# Allegro board FIBER-E1-PWR_01v1.brd
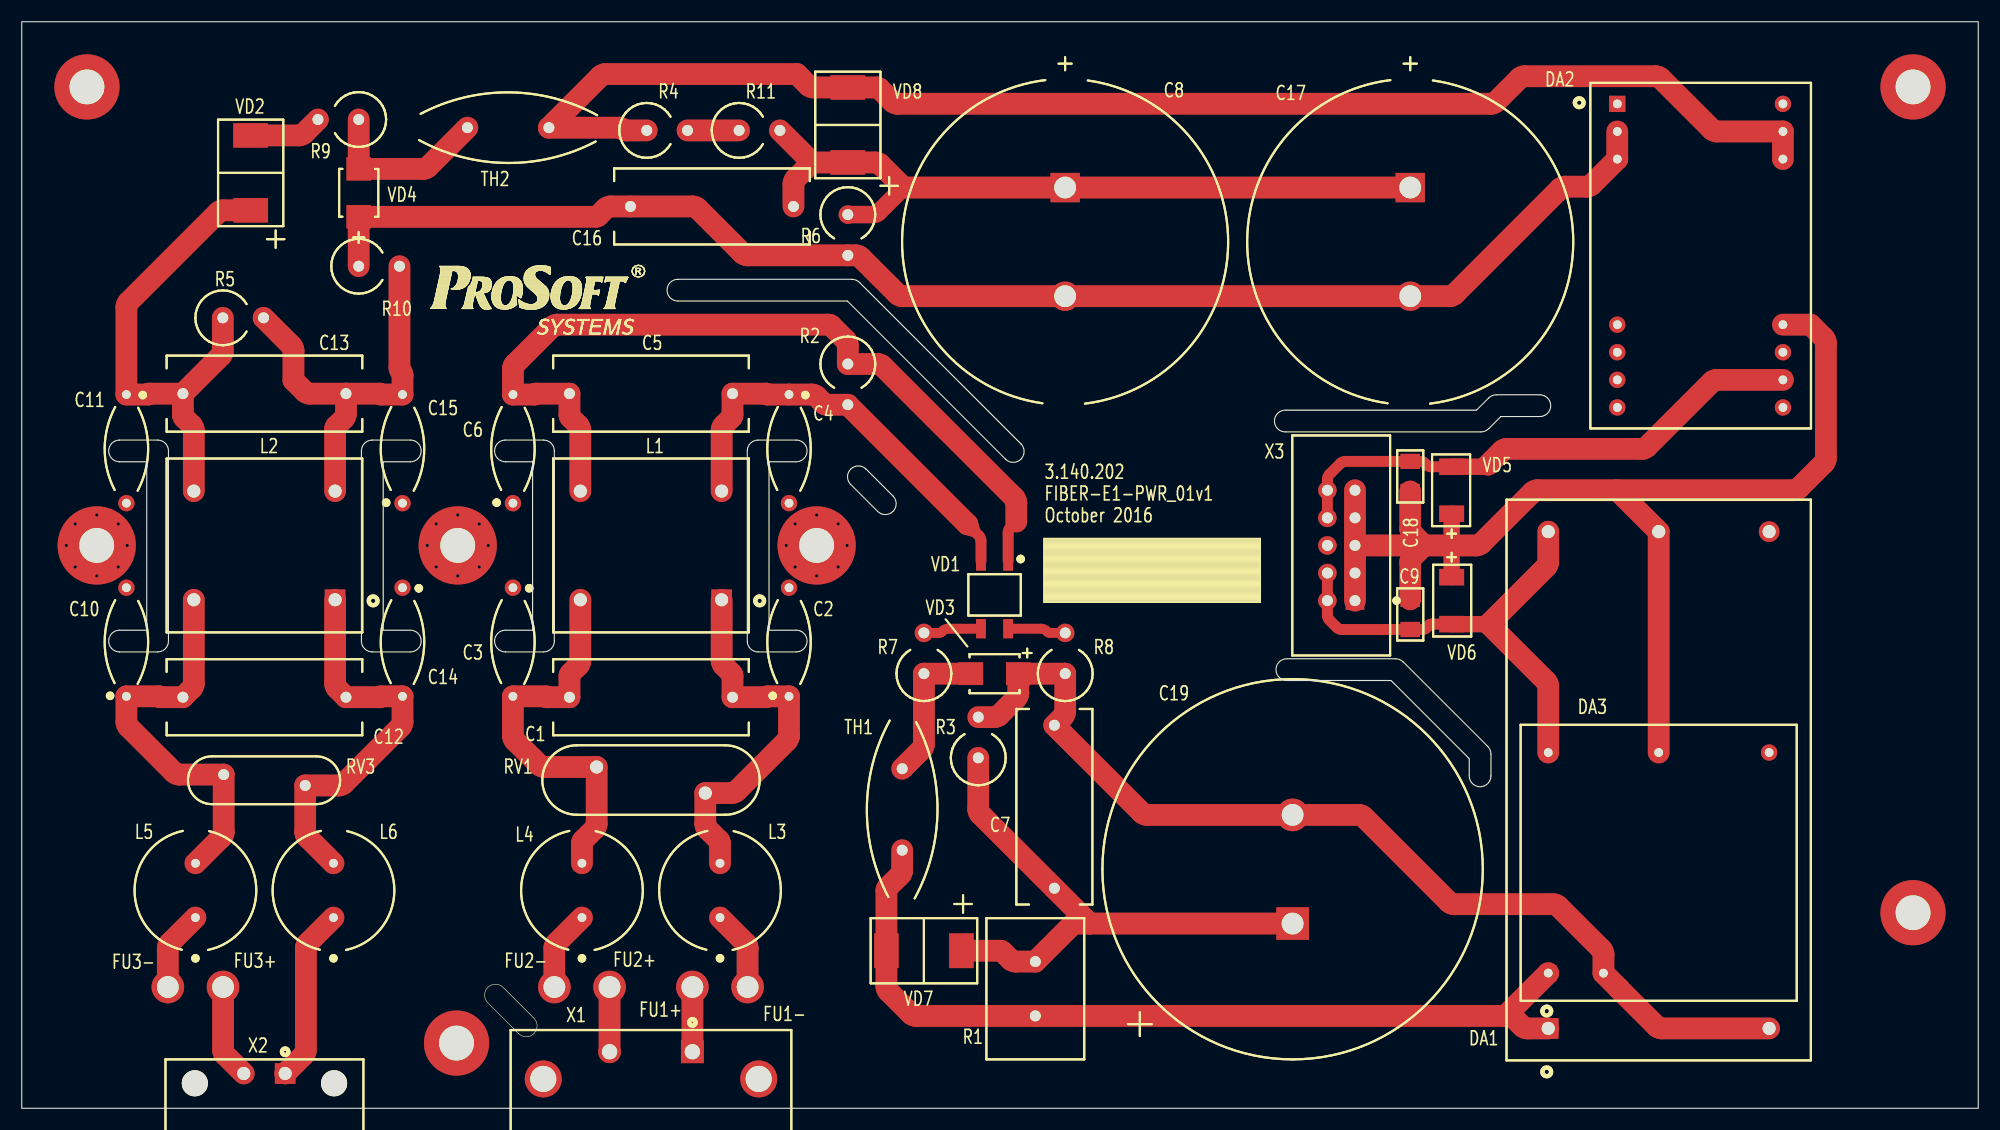
[diagram p0: board, top side]
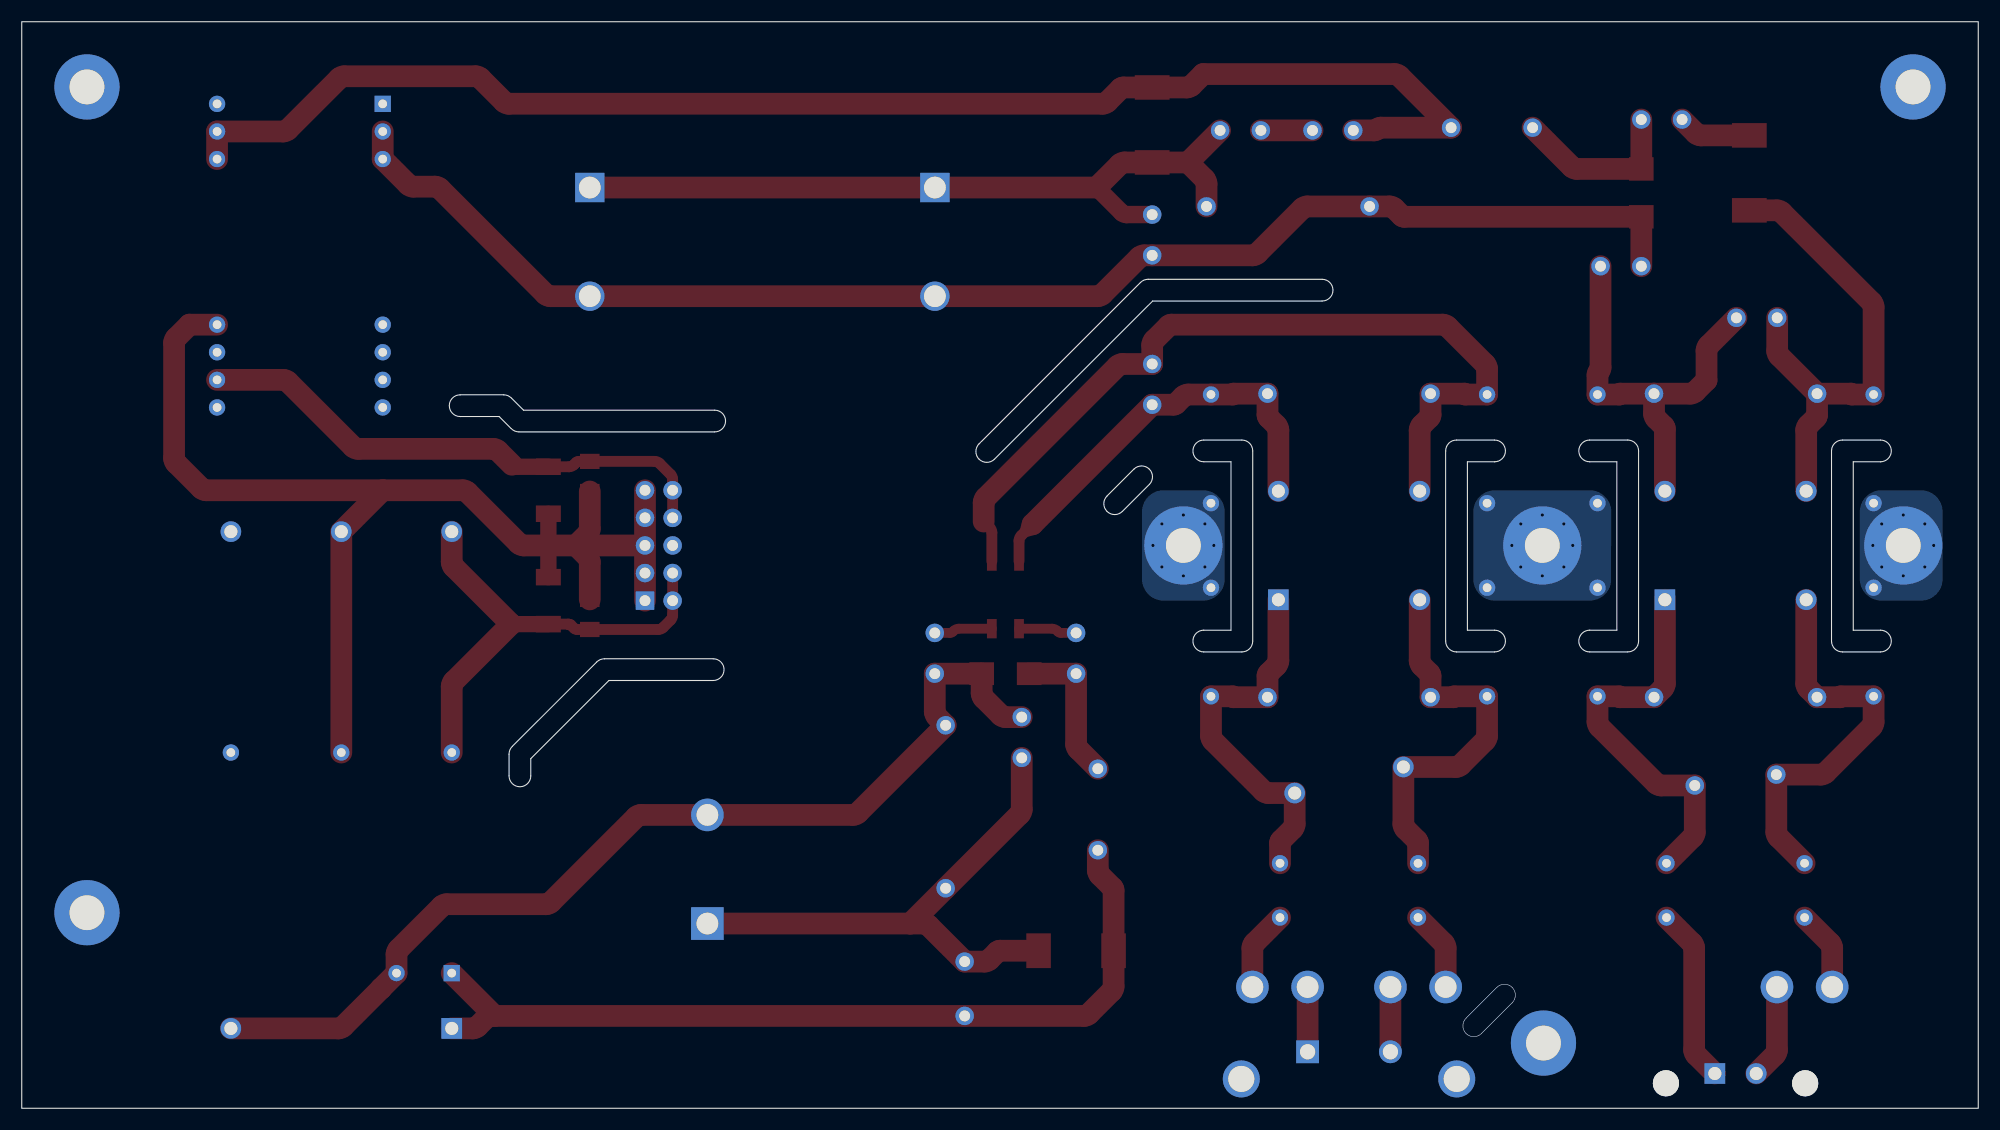
[diagram p1: board, bottom side, seen from below]

Outline 180 x 100 mm; copper layers: TOP, BOTTOM. Coordinates in mm from the lower left corner of the outline.
Outline path: rectangle 0,0 180,100 ; 9,61.5 12.5,61.5 arc(13.21,61.21) 13.5,60.5 13.5,43 arc(13.21,42.29) 12.5,42 9,42 arc(8,43) 9,44 11.5,44 11.5,59.5 9,59.5 arc(8,60.5) 9,61.5 ; 31.25,60.5 arc(31.54,61.21) 32.25,61.5 35.75,61.5 arc(36.75,60.5) 35.75,59.5 33.25,59.5 33.25,44 35.75,44 arc(36.75,43) 35.75,42 32.25,42 arc(31.54,42.29) 31.25,43 31.25,60.5 ; 42.88,11.12 arc(43.59,11.41) 44.29,11.12 47.12,8.29 arc(47.41,7.59) 47.12,6.88 arc(46.41,6.59) 45.71,6.88 42.88,9.71 arc(42.59,10.41) 42.88,11.12 ; 44.5,61.5 48,61.5 arc(48.71,61.21) 49,60.5 49,43 arc(48.71,42.29) 48,42 44.5,42 arc(43.5,43) 44.5,44 47,44 47,59.5 44.5,59.5 arc(43.5,60.5) 44.5,61.5 ; 60.37,76.3 76.37,76.3 arc(76.76,76.22) 77.09,75.99 91.92,61.15 arc(92.22,60.45) 91.92,59.74 arc(91.22,59.45) 90.51,59.74 75.95,74.3 60.37,74.3 arc(59.37,75.3) 60.37,76.3 ; 66.75,60.5 arc(67.04,61.21) 67.75,61.5 71.25,61.5 arc(72.25,60.5) 71.25,59.5 68.75,59.5 68.75,44 71.25,44 arc(72.25,43) 71.25,42 67.75,42 arc(67.04,42.29) 66.75,43 66.75,60.5 ; 76.27,58.83 arc(76.97,59.12) 77.68,58.83 80.16,56.35 arc(80.45,55.64) 80.16,54.94 arc(79.45,54.64) 78.74,54.94 76.27,57.41 arc(75.97,58.12) 76.27,58.83 ; 116.25,64.25 133.84,64.25 134.94,65.36 arc(135.27,65.58) 135.66,65.66 139.66,65.66 arc(140.66,64.66) 139.66,63.66 136.08,63.66 134.97,62.55 arc(134.64,62.33) 134.25,62.25 116.25,62.25 arc(115.25,63.25) 116.25,64.25 ; 116.39,41.37 126.39,41.37 arc(126.78,41.29) 127.11,41.06 134.86,33.31 arc(135.09,32.98) 135.17,32.59 135.17,30.59 arc(134.17,29.59) 133.17,30.59 133.17,32.18 125.98,39.37 116.39,39.37 arc(115.39,40.37) 116.39,41.37

## Design rules (mm)
nets with their own width: min track width 2; nets GND_EARTH

## Placement (name value [footprint] x y rotation side)
C1  0.22uF  [CAPRR1500W80L1800T700H1250N]  57.89 37.83 0 top
C2  470pF  [CAPRR1000W55L900T400H900N]  70.59 42.91 90 top
C3  470pF  [CAPRR1000W55L900T400H900N]  45.19 42.91 270 top
C4  470pF  [CAPRR1000W55L900T400H900N]  70.59 60.69 270 top
C5  0.22uF  [CAPRR1500W80L1800T700H1250N]  57.89 65.77 0 top
C6  470pF  [CAPRR1000W55L900T400H900N]  45.19 60.69 90 top
C7  0.22uF  [CAPRR1500W80L1800T700H1250N]  95 27.75 270 top
C8  4700uF  [CAPPRR1000W150L3000T3000H4000N]  95.99 79.74 270 top
C9  1uF  [CAPC3216X110N]  127.74 45.45 90 top
C10  470pF  [CAPRR1000W55L900T400H900N]  9.63 42.91 90 top
C11  470pF  [CAPRR1000W55L900T400H900N]  9.63 60.69 270 top
C12  0.22uF  [CAPRR1500W80L1800T700H1250N]  22.33 37.83 180 top
C13  0.22uF  [CAPRR1500W80L1800T700H1250N]  22.33 65.77 180 top
C14  470pF  [CAPRR1000W55L900T400H900N]  35.03 42.91 270 top
C15  470pF  [CAPRR1000W55L900T400H900N]  35.03 60.69 90 top
C16  0.22uF  [CAPRR1500W80L1800T700H1250N]  63.5 83 0 top
C17  4700uF  [CAPPRR1000W150L3000T3000H4000N]  127.74 79.74 270 top
C18  1uF  [CAPC3216X110N]  127.74 58.15 270 top
C19  470uF  [CAPPRR1000W55L3500T3500H5000N]  116.92 22 90 top
DA1  AMEL5-5SEMAZ  [DIP1016P4572X1780-6N]  150.6 30.21 90 top
DA2  AM3T-4805SH35Z  [DIP254P1524X1020-24N]  154.41 78.47 0 top
DA3  TMPS 03-105  [DIP1016P2030X1630-6N]  150.6 22.59 90 top
FU1+  TP  [KP_W150H100]  61.7 11.16 0 top
FU1-  TP  [KP_W150H100]  66.78 11.16 0 top
FU2+  TP  [KP_W150H100]  54.08 11.16 0 top
FU2-  TP  [KP_W150H100]  49 11.16 0 top
FU3+  TP  [KP_W150H100]  18.52 11.16 0 top
FU3-  TP  [KP_W150H100]  13.44 11.16 0 top
L1  PLY10AN1521R6R2B  [FIL_PLY10]  57.89 51.8 180 top
L2  PLY10AN1521R6R2B  [FIL_PLY10]  22.33 51.8 180 top
L3  22u  [INDRR500W65L1120T1120H1220N]  64.24 20.05 90 top
L4  22u  [INDRR500W65L1120T1120H1220N]  51.54 20.05 90 top
L5  22u  [INDRR500W65L1120T1120H1220N]  15.98 20.05 90 top
L6  22u  [INDRR500W65L1120T1120H1220N]  28.68 20.05 90 top
MH1  3mm  [MTG720H320]  6.9 51.8 0 top
MH2  3mm  [MTG720H320]  40.11 51.8 0 top
MH3  3mm  [MTG720H320]  73.13 51.8 0 top
NOREF  -  []  0 0 90 top
NOREF#2  -  []  0 100 0 top
NOREF#3  -  []  37 70.5 0 top
NOREF#4  -  []  40 6 0 top
NOREF#5  -  []  6 94 0 top
NOREF#6  -  [unnamed#2]  6 94 0 top
NOREF#7  -  []  174 18 90 top
NOREF#8  -  []  104 49.5 0 top
NOREF#9  -  []  40 6 90 top
NOREF#10  -  []  6 94 90 top
NOREF#11  -  []  121.39 51.8 90 top
NOREF#12  -  [unnamed#2]  174 18 0 top
NOREF#13  -  []  121.39 51.8 0 top
NOREF#14  -  [unnamed#2]  40 6 0 top
NOREF#15  -  [unnamed#2]  174 94 0 top
NOREF#16  -  []  70.8 -4.8 90 top
R1  *5.1k  [RESAD500W80L1300D900N]  93.25 11 270 top
R2  1M  [RESAD2250W80L1600D505N]  76 68.5 90 top
R3  1M  [RESAD2250W80L1600D505N]  88 32.25 270 top
R4  510  [RESAD2250W80L1600D505N]  57.5 90 180 top
R5  1M  [RESAD2250W80L1600D505N]  18.5 72.75 180 top
R6  1M  [RESAD2250W80L1600D505N]  76 82.25 90 top
R7  510  [RESAD2250W80L1600D505N]  83 40 270 top
R8  510  [RESAD2250W80L1600D505N]  96 40 270 top
R9  5.1  [RESAD2250W80L1600D505N]  31 91 0 top
R10  5.1  [RESAD2250W80L1600D505N]  31 77.5 180 top
R11  510  [RESAD2250W80L1600D505N]  66 90 180 top
RV1  390V  [VAR_JVR-20N391K]  57.89 30.21 180 top
RV3  82V  [VAR_JVR-14N820K]  22.33 30.21 0 top
TH1  7  [RESRB750W80L1750T650H2300]  81 27.5 90 top
TH2  7  [RESRB750W80L1750T650H2300]  44.75 90.25 180 top
VD1  B8S  [SOT250P700X270-4N]  89.5 47.25 270 top
VD2  S3M  [DIOM7959X265N]  21.06 86.09 270 top
VD3  400V  [DIOM5436X230N]  89.5 40 0 top
VD4  48V  [DIOM5436X250N]  31 84.25 270 top
VD5  6V8  [DIOM5336X265N]  131.55 56.88 270 top
VD6  6V8  [DIOM5336X265N]  131.55 46.72 90 top
VD7  S3M  [DIOM7959X265N]  83 14.5 0 top
VD8  S3M  [DIOM7959X265N]  76 90.5 270 top
X1  220VAC  [PHOENIX_1806229]  61.7 5.2 0 top
X2  48V  [PHOENIX_1827868]  24.23 3.2 0 top
X3  IDC-10M  [SHDR0S254P5X2_2025X900X900]  122.66 46.72 90 top

## Library data of the parts
C1-C7 C9-C16 C18 = CAPACITOR
C8 C17 C19 = CAPACITOR_POL
DA1 = AMEL5_xSxMAZ
DA2 = AM3T_SH35Z_3
DA3 = TRACO_TMPS 03_0
FU1+ FU1- FU2+ FU2- FU3+ FU3- = TP
L1 L2 = PLY10_0
L3-L6 = INDUCTOR
MH1-MH3 = MOUNTING_HOLE_PLATED
R1 = R_5W
R2 R3 R5 R6 = R_0: alternate symbols: (RESAD375W80L505D505N)
R4 R7-R11 = R_2W: alternate symbols: (RESAD375W80L505D505N)
RV1 RV3 = VARISTOR
TH1 TH2 = thermistor
VD1 = DIOD_MOST_0
VD2 VD7 VD8 = DIODE
VD3 = SUPRESSOR_POL_0
VD4 = SUPRESSOR_POL_2
VD5 VD6 = SUPRESSOR_POL
X1 = CONN2_SHIELD_3
X2 = CONN2_2
X3 = CONN10: alternate symbols: (IDC10M_EDGE)

## Footprints (pads in the part's own frame, mm; a bottom-side part is the same pattern mirrored in y, then rotated)
CAPC3216X110N
  rect 1.4x1.8 smd: 1(-1.385,0) 2(1.385,0)
CAPPRR1000W55L3500T3500H5000N
  rect 3x3 hole 2: 1(-5,0)
  round 3 hole 2: 2(5,0)
CAPPRR1000W150L3000T3000H4000N
  rect 2.7x2.7 hole 2: 1(-5,0)
  round 2.7 hole 2: 2(5,0)
CAPRR1000W55L900T400H900N
  round 1.5 hole 0.8: 1(-5,0) 2(5,0)
CAPRR1500W80L1800T700H1250N
  round 1.7 hole 1: 1(-7.5,0) 2(7.5,0)
DIOM5336X265N
  rect 1.52x2.3 smd: 1(-2.162,0) 2(2.162,0)
DIOM5436X230N
  rect 2.275x2.1 smd: 1(-2.188,0) 2(2.188,0)
DIOM5436X250N
  rect 2.16x2.26 smd: 1(-2.205,0) 2(2.205,0)
DIOM7959X265N
  rect 2.26x3.2 smd: 1(-3.45,0) 2(3.45,0)
DIP254P1524X1020-24N
  rect 1.5x1.5 hole 0.8: 1(-7.62,13.97)
  round 1.5 hole 0.8: 2(-7.62,11.43) 3(-7.62,8.89) 9(-7.62,-6.35) 10(-7.62,-8.89) 11(-7.62,-11.43) 12(-7.62,-13.97) 13(7.62,-13.97) 14(7.62,-11.43) 15(7.62,-8.89) 16(7.62,-6.35) 22(7.62,8.89) 23(7.62,11.43) 24(7.62,13.97)
DIP1016P2030X1630-6N
  rect 1.5x1.5 hole 0.8: 1(-10.15,10.16)
  round 1.5 hole 0.8: 2(-10.15,5.08) 3(10.15,-10.16) 4(10.15,0) 5(10.15,10.16)
DIP1016P4572X1780-6N
  rect 1.9x1.9 hole 1.2: 1(-22.86,10.16)
  round 1.9 hole 1.2: 2(-22.86,-10.16) 3(22.86,10.16) 4(22.86,0) 5(22.86,-10.16)
FIL_PLY10
  rect 1.9x1.9 hole 1.2: 1(-6.5,5)
  round 1.9 hole 1.2: 2(-6.5,-5) 3(6.5,-5) 4(6.5,5)
INDRR500W65L1120T1120H1220N
  round 1.5 hole 0.8: 1(-2.5,0) 2(2.5,0)
KP_W150H100
  round 3 hole 2: 1(0,0)
MTG720H320
  round 7.2 hole 3.2: 1(0,0)
PHOENIX_1806229
  rect 2.1x2.1 hole 1.4: 1(0,0)
  round 2.1 hole 1.4: 2(-7.62,0)
  round 3.4 hole 2.4: SHIELD1(-13.72,-2.5) SHIELD2(6.1,-2.5)
PHOENIX_1827868
  round 2.4 hole 2.4 unplated: (-8.31,-0.9) (4.5,-0.9)
  rect 1.9x1.9 hole 1.2: 1(0,0)
  round 1.9 hole 1.2: 2(-3.81,0)
RESAD500W80L1300D900N
  round 1.7 hole 1: 1(-2.5,0) 2(2.5,0)
RESAD2250W80L1600D505N
  round 1.7 hole 1: 1(-3.75,0) 2(0,0)
RESRB750W80L1750T650H2300
  round 1.7 hole 1: 1(-3.75,0) 2(3.75,0)
SHDR0S254P5X2_2025X900X900
  rect 1.7x1.7 hole 1: 1(0,0)
  round 1.7 hole 1: 2(0,2.54) 3(2.54,0) 4(2.54,2.54) 5(5.08,0) 6(5.08,2.54) 7(7.62,0) 8(7.62,2.54) 9(10.16,0) 10(10.16,2.54)
SOT250P700X270-4N
  rect 1.775x0.9 smd: 1(-3.112,1.25) 2(-3.112,-1.25) 3(3.112,-1.25) 4(3.112,1.25)
unnamed#2
  round 6 hole 3.2: 1(0,0)
VAR_JVR-14N820K
  round 1.7 hole 1: 1(-3.75,0.5) 2(3.75,-0.5)
VAR_JVR-20N391K
  round 1.9 hole 1.2: 1(-5,1.2) 2(5,-1.2)

## Nets
GND: C9.2 C18.2 DA1.4(-VOUT) DA2.16(-VOUT) DA3.4(-VOUT) VD5.2(ANODE) VD6.2(ANODE) X3.1 X3.3 X3.5 X3.7 X3.9
GND_EARTH: C2.2 C3.1 C4.2 C6.1 C10.2 C11.2 C14.1 C15.1 MH1.1 MH2.1 MH3.1
N1859833: FU1+.1 X1.1(-)
N1859855: C1.2 C2.1 L1.1 L3.2 RV1.1
N1859873: C1.1 C3.2 L1.4 L4.2 RV1.2
N1860629: C4.1 C5.2 L1.2 R2.1 VD1.2(IN2)
N1860633: C5.1 C6.2 L1.3 R2.2 VD1.1(IN1)
N1861955: C7.1 C19.2 DA1.2(AC_L) DA3.2(AC_L) R3.1 R8.2 VD3.2(ANODE)
N1862066: DA1.1(AC_N) DA3.1(AC_N) R1.2 TH1.1 VD7.1(CATHODE)
N1862585: C9.1 DA1.3(+VOUT) DA3.5(+VOUT) VD6.1(CATHODE) X3.2 X3.4
N1866469: C18.1 DA2.14(+VOUT) VD5.1(CATHODE) X3.8 X3.10
N1869514: C11.1 C13.2 L2.3 R5.2 VD2.2(ANODE)
N1869554: C8.1 C16.2 C17.1 R6.2 R11.1 VD8.2(ANODE)
N1869574: C8.2 C16.1 C17.2 DA2.2(-V IN#2) DA2.3(-V IN#3) R6.1 R10.2 VD4.2(ANODE)
N1869642: DA2.22(+V IN#22) DA2.23(+V IN#23) R4.2 TH2.1 VD8.1(CATHODE)
N1869794: C10.1 C12.2 L2.4 L5.2 RV3.1
N1869810: C12.1 C14.2 L2.1 L6.2 RV3.2
N1869998: C13.1 C15.2 L2.2 R5.1 R10.1
N1874089: FU1-.1 L3.1
N1874294: FU2+.1 X1.2(+)
N1874423: FU3+.1 X2.2(+)
N1874427: FU3-.1 L5.1
N1874451: L6.1 X2.1(-)
N1877590: R9.1 VD2.1(CATHODE)
N1878411: R7.2 TH1.2 VD3.1(CATHODE)
N1878415: R7.1 VD1.3(+)
N1878419: R8.1 VD1.4(-)
N1878478: R9.2 TH2.2 VD4.1(CATHODE)
N1898564: FU2-.1 L4.1
N1905384: C7.2 C19.1 R1.1 R3.2 VD7.2(ANODE)
N19088750: R4.1 R11.2

Pads without a net: DA1 5; DA2 1 9 10 11 12 13 15 24; DA3 3; NOREF#6 1; NOREF#12 1; NOREF#14 1; NOREF#15 1; X1 SHIELD1 SHIELD2; X3 6

## Via types
v1: diameter 0.8, hole 0.3, TOP to BOTTOM, 24 vias

## Routing (per net, layer and track width the routed paths; a pad name or vN(x,y) marks a point on that pad's centre or on a via; arc(x,y) is an arc through that point)
GND: length 115
  TOP w1.5: VD5.2 131.55,52.51 arc(131.6,52.27) 131.74,52.06 132,51.8 131.74,51.54 arc(131.6,51.33) 131.55,51.09 VD6.2
  TOP w2: X3.9 X3.7 X3.5 ; 129.01,51.8 133.83,51.8 arc(134.07,51.85) 134.28,51.99 138.98,56.69 arc(139.19,56.83) 139.43,56.88 146.79,56.88 ; 129.01,51.8 X3.5 ; 129.01,51.8 127.93,50.72 arc(127.79,50.51) 127.74,50.27 C9.2 ; 129.01,51.8 127.93,52.88 arc(127.79,53.09) 127.74,53.33 C18.2 ; DA3.4 DA1.4 146.79,56.88 ; X3.5 X3.3 X3.1 ; 146.79,56.88 163.04,56.88 arc(163.28,56.93) 163.49,57.07 165.8,59.38 arc(165.94,59.58) 165.99,59.83 165.99,70.44 arc(165.94,70.68) 165.8,70.89 164.57,72.12 DA2.16
GND_EARTH:
  vias: v1(4.1,51.8) v1(4.92,53.78) v1(4.92,49.82) v1(6.9,54.6) v1(6.9,49) v1(8.88,53.78) v1(8.88,49.82) v1(9.7,51.8) v1(37.31,51.8) v1(38.13,53.78) v1(38.13,49.82) v1(40.11,54.6) v1(40.11,49) v1(42.09,53.78) v1(42.09,49.82) v1(42.91,51.8) v1(70.33,51.8) v1(71.15,53.78) v1(71.15,49.82) v1(73.13,54.6) v1(73.13,49) v1(75.11,53.78) v1(75.11,49.82) v1(75.93,51.8)
N1859833: length 6
  TOP w2: X1.1 FU1+.1
N1859855: length 35.2
  TOP w2: L1.1 64.39,41.19 arc(64.44,40.95) 64.58,40.74 65.3,40.02 arc(65.37,39.92) 65.39,39.8 C1.2 68.51,37.83 68.59,37.91 C2.1 70.59,34.28 arc(70.54,34.04) 70.4,33.83 65.77,29.2 arc(65.56,29.06) 65.32,29.01 RV1.1 62.89,26.16 arc(62.94,25.92) 63.08,25.71 64.15,24.64 arc(64.22,24.54) 64.24,24.42 L3.2
N1859873: length 36.6
  TOP w2: L1.4 51.39,41.19 arc(51.34,40.95) 51.2,40.74 50.48,40.02 arc(50.41,39.92) 50.39,39.8 C1.1 48.29,37.83 48.21,37.91 C3.2 45.19,34.28 arc(45.24,34.04) 45.38,33.83 47.61,31.6 arc(47.82,31.46) 48.06,31.41 RV1.2 52.89,26.16 arc(52.84,25.92) 52.7,25.71 51.63,24.64 arc(51.56,24.54) 51.54,24.42 L4.2
N1860629: length 39.8
  TOP w1: 87,53.75 88.06,52.69 arc(88.2,52.48) 88.25,52.24 VD1.2
  TOP w2: 87,53.75 R2.1 74.03,64.75 arc(73.91,64.77) 73.81,64.84 73.15,65.5 arc(72.94,65.64) 72.7,65.69 C4.1 68.59,65.69 68.51,65.77 C5.2 65.39,63.8 arc(65.37,63.68) 65.3,63.58 64.58,62.86 arc(64.44,62.65) 64.39,62.41 L1.2
N1860633: length 78.7
  TOP w1: 91.5,54 90.94,53.44 arc(90.8,53.23) 90.75,52.99 VD1.1
  TOP w2: L1.3 51.39,62.41 arc(51.34,62.65) 51.2,62.86 50.48,63.58 arc(50.41,63.68) 50.39,63.8 C5.1 47.27,65.77 47.19,65.69 C6.2 45.19,68.05 arc(45.24,68.29) 45.38,68.5 48.81,71.93 arc(49.02,72.07) 49.26,72.12 74.25,72.12 arc(74.37,72.1) 74.47,72.03 75.81,70.69 arc(75.95,70.48) 76,70.24 R2.2 78.74,68.5 arc(78.98,68.45) 79.19,68.31 91.31,56.19 arc(91.45,55.98) 91.5,55.74 91.5,54
N1861955: length 94.3
  TOP w2: R3.1 89.49,36 arc(89.73,36.05) 89.94,36.19 91.5,37.75 arc(91.64,37.96) 91.69,38.2 VD3.2 R8.2 96,36.51 arc(95.95,36.27) 95.81,36.06 C7.1 103.06,27.19 arc(103.27,27.05) 103.51,27 C19.2 123.02,27 arc(123.26,26.95) 123.47,26.81 131.31,18.97 arc(131.52,18.83) 131.76,18.78 140.92,18.78 arc(141.16,18.73) 141.37,18.59 145.33,14.63 arc(145.47,14.42) 145.52,14.18 DA3.2 146.94,11.03 146.94,11.02 150.41,7.54 arc(150.62,7.4) 150.86,7.35 DA1.2
N1862066: length 81.2
  TOP w2: 136.5,8.5 DA3.1 ; 136.5,8.5 R1.2 82.26,8.5 arc(82.02,8.55) 81.81,8.69 79.74,10.76 arc(79.6,10.97) 79.55,11.21 VD7.1 79.55,20.07 arc(79.57,20.19) 79.64,20.29 80.81,21.46 arc(80.95,21.67) 81,21.91 TH1.1 ; 136.5,8.5 136.96,8.5 arc(137.08,8.48) 137.18,8.41 138.05,7.54 arc(138.26,7.4) 138.5,7.35 DA1.1
N1862585: length 44.4
  TOP w1: VD6.1 129.7,44.56 129.64,44.5 129.5,44.5 129.16,44.16 arc(129.05,44.09) 128.93,44.06 121.44,44.06 arc(121.2,44.11) 120.99,44.25 120.31,44.93 arc(120.17,45.14) 120.12,45.38 X3.2 X3.4
  TOP w1.5: VD6.1 134.98,44.56
  TOP w2: DA3.5 140.44,38.84 arc(140.39,39.08) 140.25,39.29 134.98,44.56 140.25,49.83 arc(140.39,50.04) 140.44,50.28 DA1.3
N1866469: length 49.6
  TOP w1: VD5.1 129.65,59.04 arc(129.41,59.09) 129.2,59.23 128.99,59.44 arc(128.88,59.51) 128.76,59.53 C18.1 121.77,59.53 arc(121.52,59.49) 121.32,59.35 120.31,58.34 arc(120.17,58.13) 120.12,57.89 X3.10 X3.8
  TOP w1.5: VD5.1 134.46,59.04 arc(134.7,59.09) 134.91,59.23
  TOP w2: DA2.14 155.94,67.04 arc(155.7,66.99) 155.49,66.85 149.52,60.88 arc(149.31,60.74) 149.07,60.69 136.63,60.69 arc(136.39,60.64) 136.18,60.5 134.91,59.23
N1869514: length 46.3
  TOP w2: VD2.2 18.52,82.64 arc(18.28,82.59) 18.07,82.45 9.82,74.2 arc(9.68,73.99) 9.63,73.75 C11.1 11.63,65.69 11.71,65.77 C13.2 ; C13.2 18.31,69.25 arc(18.45,69.46) 18.5,69.7 R5.2 ; C13.2 14.83,63.8 arc(14.85,63.68) 14.92,63.58 15.64,62.86 arc(15.78,62.65) 15.83,62.41 L2.3
N1869554: length 71
  TOP w1.6: R6.2 78.36,82.25 arc(78.6,82.3) 78.81,82.44 81.11,84.74
  TOP w2: 72.7,87.05 71.19,85.54 arc(71.05,85.33) 71,85.09 C16.2 ; 72.7,87.05 VD8.2 78.54,87.05 arc(78.78,87) 78.99,86.86 81.11,84.74 C8.1 C17.1 ; 72.7,87.05 R11.1
N1869574: length 131.7
  TOP w2: R10.2 VD4.2 52.81,82.05 arc(52.93,82.07) 53.04,82.14 53.71,82.81 arc(53.92,82.95) 54.16,83 C16.1 61.74,83 arc(61.98,82.95) 62.19,82.81 66.31,78.69 arc(66.52,78.55) 66.76,78.5 R6.1 76.74,78.5 arc(76.98,78.45) 77.19,78.31 80.57,74.93 arc(80.78,74.79) 81.02,74.74 C8.2 C17.2 131.37,74.74 arc(131.61,74.79) 131.82,74.93 141.52,84.63 arc(141.73,84.77) 141.97,84.82 143.99,84.82 arc(144.23,84.87) 144.44,85.01 DA2.3 DA2.2
N1869642: length 131.3
  TOP w2: R4.2 55.58,90 arc(55.41,90.03) 55.27,90.13 arc(55.14,90.22) 54.97,90.25 TH2.1 53.25,95 arc(53.45,95.13) 53.7,95.18 71.32,95.18 72.36,94.14 arc(72.57,94) 72.81,93.95 VD8.1 78.67,93.95 arc(78.79,93.93) 78.89,93.86 80.11,92.64 arc(80.32,92.5) 80.56,92.45 135.19,92.45 arc(135.43,92.5) 135.64,92.64 137.79,94.79 arc(138,94.93) 138.24,94.98 150.34,94.98 arc(150.58,94.93) 150.79,94.79 155.49,90.09 arc(155.7,89.95) 155.94,89.9 DA2.23 DA2.22
N1869794: length 37.2
  TOP w2: L2.4 15.83,39.09 arc(15.78,38.85) 15.64,38.64 C12.2 12.73,37.83 12.65,37.91 C10.1 9.63,35.55 arc(9.68,35.31) 9.82,35.1 14.02,30.9 arc(14.23,30.76) 14.47,30.71 RV3.1 18.58,25.41 arc(18.53,25.17) 18.39,24.96 L5.2
N1869810: length 36.6
  TOP w2: L2.1 28.83,39.09 arc(28.88,38.85) 29.02,38.64 C12.1 32.95,37.83 33.03,37.91 C14.2 35.03,35.55 arc(34.98,35.31) 34.84,35.1 29.64,29.9 arc(29.43,29.76) 29.19,29.71 RV3.2 26.08,25.41 arc(26.13,25.17) 26.27,24.96 L6.2
N1869998: length 38.6
  TOP w2: C13.1 26.49,65.77 arc(26.25,65.82) 26.04,65.96 25,67 25,69.74 arc(24.95,69.98) 24.81,70.19 R5.1 ; C13.1 29.83,63.93 arc(29.78,63.69) 29.64,63.48 28.92,62.76 arc(28.85,62.66) 28.83,62.54 L2.2 ; C13.1 32.95,65.77 33.03,65.69 C15.2 35.03,67.49 arc(34.99,67.68) 34.89,67.83 arc(34.79,67.99) 34.75,68.17 R10.1
N1874089: length 7.4
  TOP w2: L3.1 66.59,15.2 arc(66.73,14.99) 66.78,14.75 FU1-.1
N1874294: length 6
  TOP w2: X1.2 FU2+.1
N1874423: length 8.7
  TOP w2: X2.2 18.71,4.92 arc(18.57,5.13) 18.52,5.37 FU3+.1
N1874427: length 7.4
  TOP w2: L5.1 13.63,15.2 arc(13.49,14.99) 13.44,14.75 FU3-.1
N1874451: length 16.1
  TOP w2: L6.1 26.33,15.2 arc(26.19,14.99) 26.14,14.75 26.14,5.37 arc(26.09,5.12) 25.95,4.92 X2.1
N1877590: length 6.8
  TOP w2: VD2.1 25.53,89.54 arc(25.77,89.59) 25.98,89.73 R9.1
N1878411: length 13.9
  TOP w2: VD3.1 R7.2 83,33.51 arc(82.95,33.27) 82.81,33.06 TH1.2
N1878415: length 5.4
  TOP w0.9: R7.1 84.42,43.75 arc(84.54,43.77) 84.64,43.84 84.75,43.95 arc(84.96,44.09) 85.2,44.14 VD1.3
N1878419: length 5.4
  TOP w0.9: VD1.4 93.8,44.14 arc(94.04,44.09) 94.25,43.95 94.36,43.84 arc(94.46,43.77) 94.58,43.75 R8.1
N1878478: length 16.1
  TOP w2: TH2.2 37.39,86.64 arc(37.18,86.5) 36.94,86.45 VD4.1 R9.2
N1898564: length 7.4
  TOP w2: L4.1 49.19,15.2 arc(49.05,14.99) 49,14.75 FU2-.1
N1905384: length 51.7
  TOP w2: R3.2 88,27.51 arc(88.05,27.27) 88.19,27.06 C7.2 98.25,17 ; 98.25,17 97.01,17 arc(96.77,16.95) 96.56,16.81 R1.1 91.41,13.5 arc(91.17,13.55) 90.96,13.69 90.24,14.41 arc(90.14,14.48) 90.02,14.5 VD7.2 ; 98.25,17 C19.1
N19088750: length 4.8
  TOP w2: R4.1 R11.2

## Copper pours and planes (outline as drawn; the poured copper is in the pictures)
GND_EARTH on BOTTOM: 69.32,48.72 69.91,47.31 71.32,46.72 74.94,46.72 76.35,47.31 76.94,48.72 76.94,54.88 76.35,56.29 74.94,56.88 71.32,56.88 69.91,56.29 69.32,54.88
GND_EARTH on BOTTOM: 33.76,48.72 34.35,47.31 35.76,46.72 44.46,46.72 45.87,47.31 46.46,48.72 46.46,54.88 45.87,56.29 44.46,56.88 35.76,56.88 34.35,56.29 33.76,54.88
GND_EARTH on BOTTOM: 3.28,48.72 3.87,47.31 5.28,46.72 8.9,46.72 10.31,47.31 10.9,48.72 10.9,54.88 10.31,56.29 8.9,56.88 5.28,56.88 3.87,56.29 3.28,54.88
N1860629 on TOP (solid shape): 86.74,52.78 86.29,54.46 87.97,54.01 88.19,53.17 88.06,52.69 87.58,52.56

## Text on the board
Ref Des/Silkscreen Top: 3.140.202 | FIBER-E1-PWR_01v1 | October 2016
DISPLAY_TOP: 3.140.202 | FIBER-E1-PWR_01v1 | October 2016
